# Altium PCB YiWallet-Enc-memory.PcbDoc
Units mm, origin at the board's own origin, x right, y up, seen from the top; angles counter-clockwise.
Board outline 15 x 30 mm, 4 copper layers (Top Layer, GND, VCC, Bottom Layer), stack 0.778 mm thick; 21 components, 23 nets, 98 pads, 22 vias.
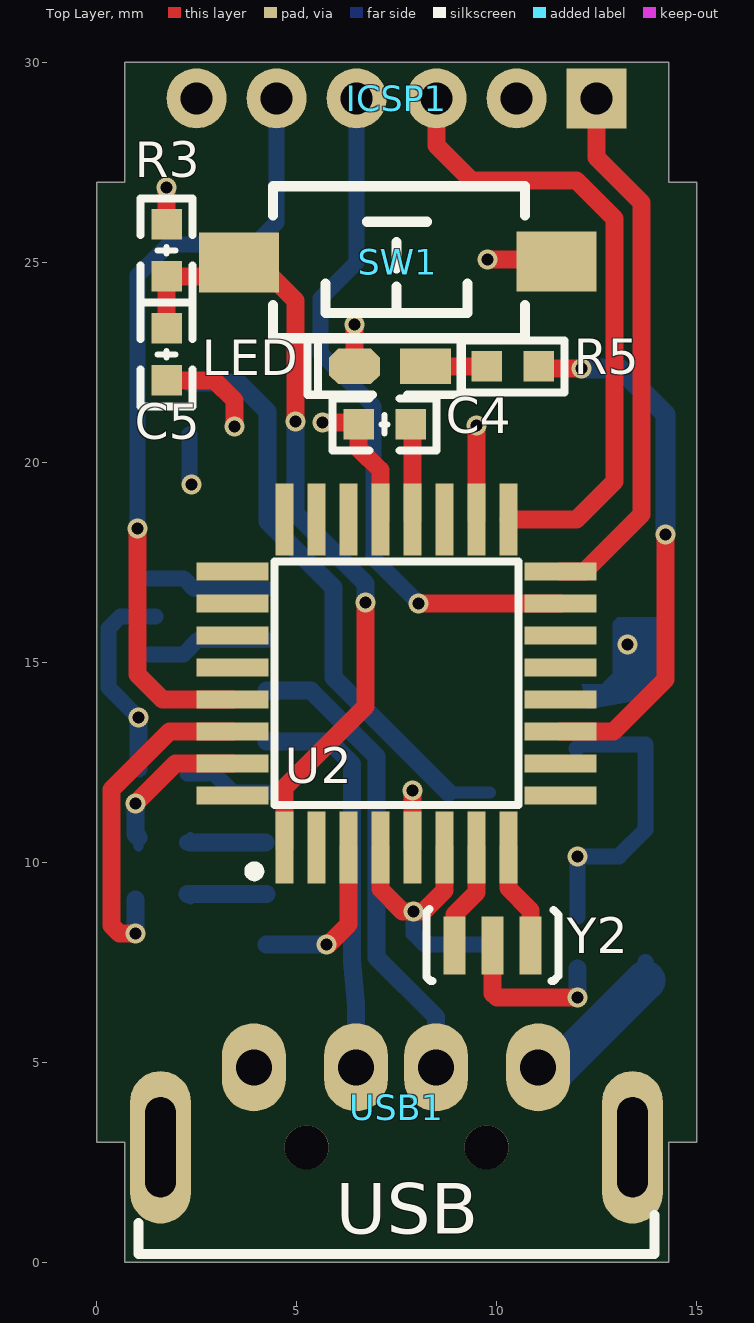
[diagram p0: Top Layer view]
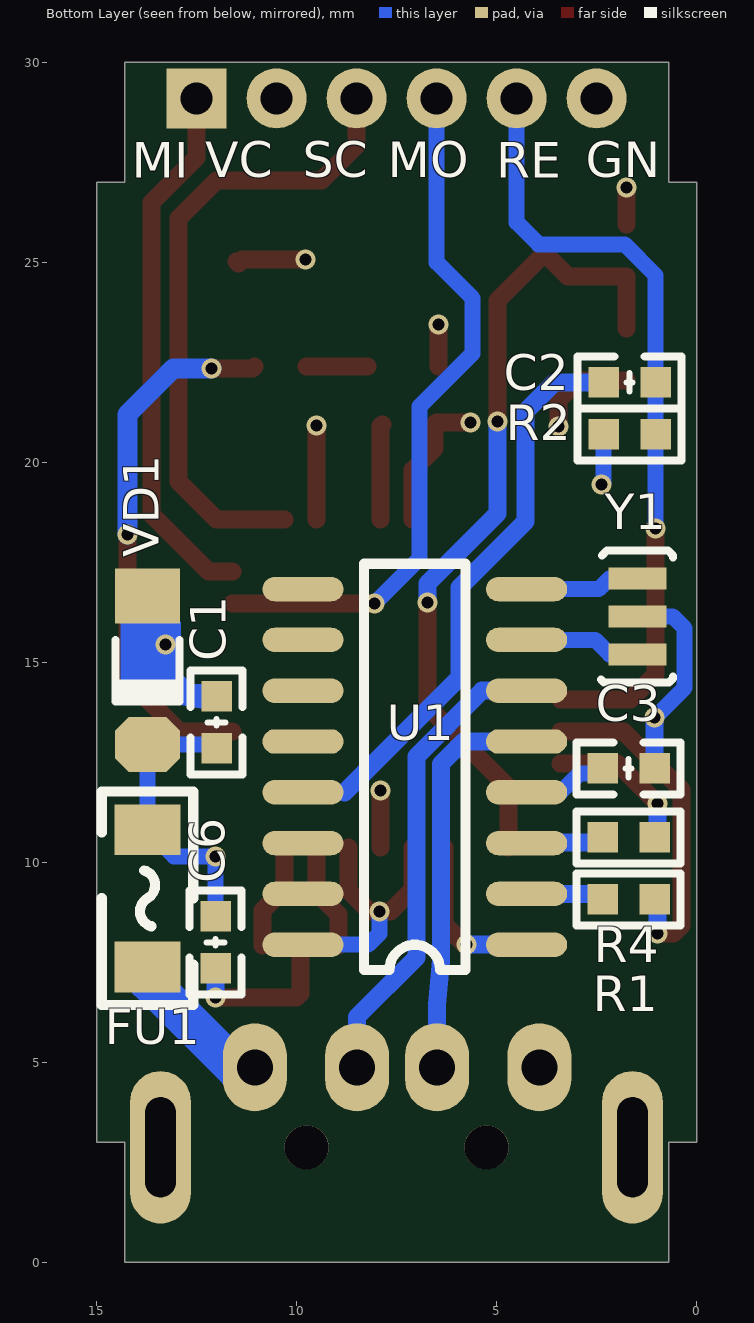
[diagram p1: Bottom Layer view, seen from below]
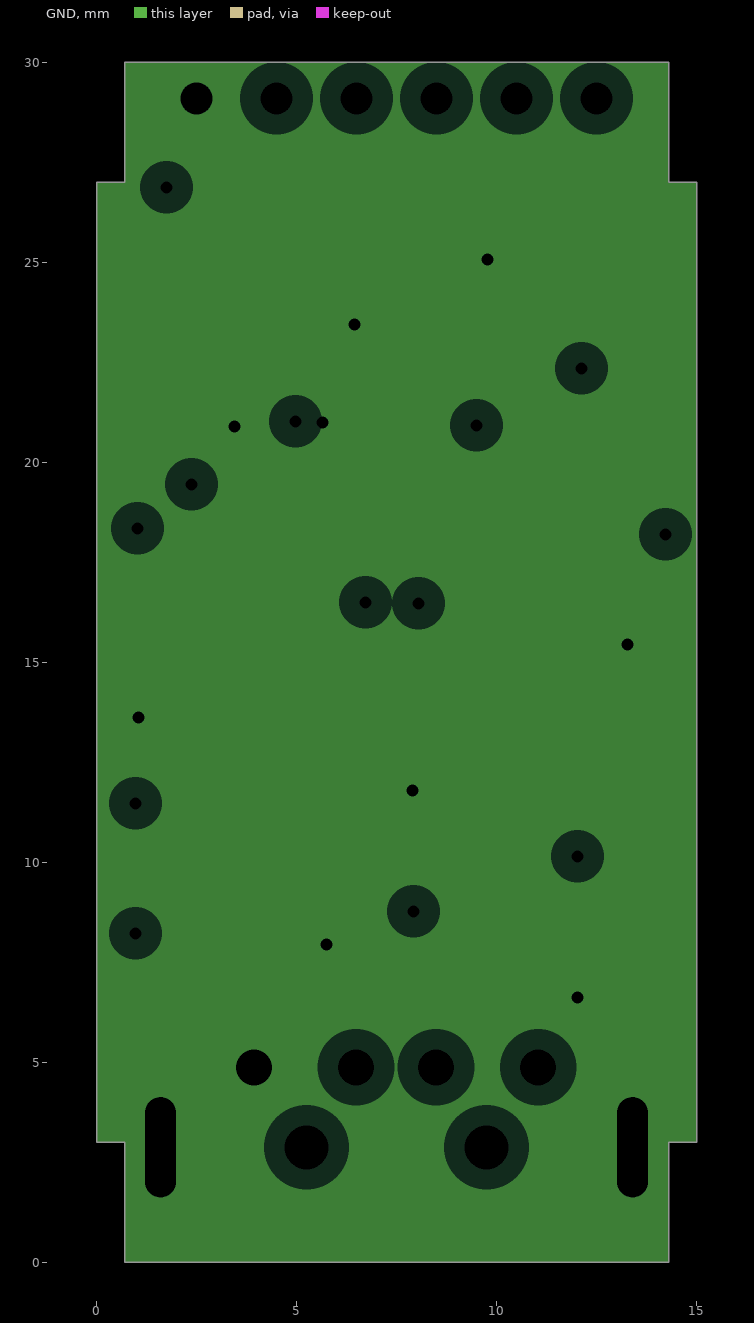
[diagram p2: GND, clearances drawn from the general rule]
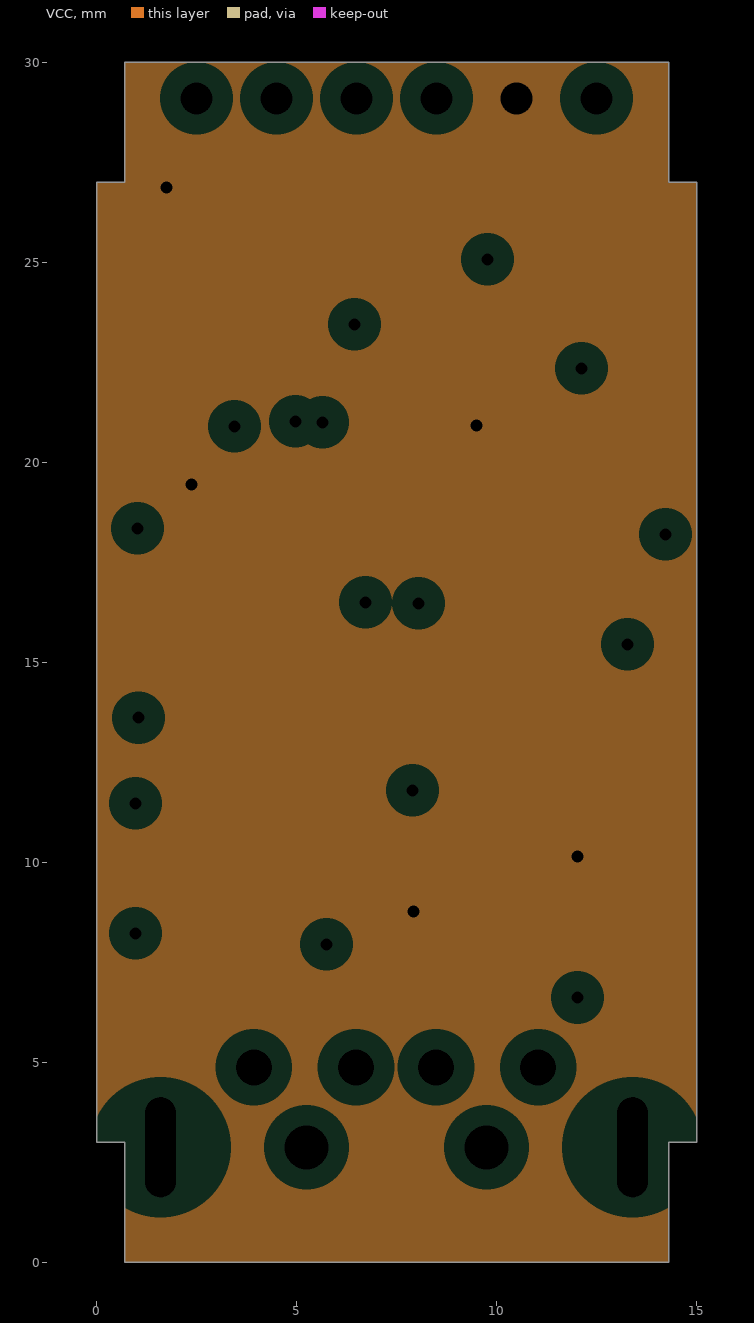
[diagram p3: VCC, clearances drawn from the general rule]
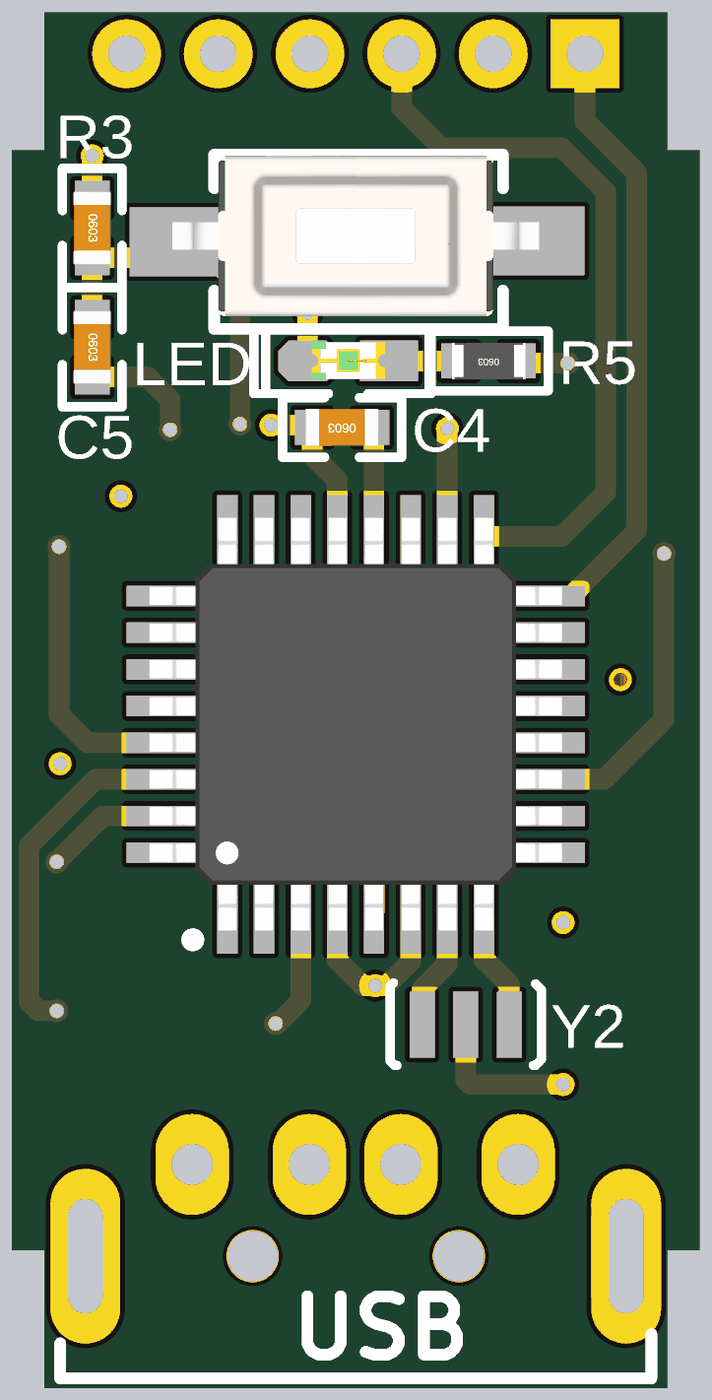
[diagram p4: 3D render of the assembled board from above, using the file's embedded part models]
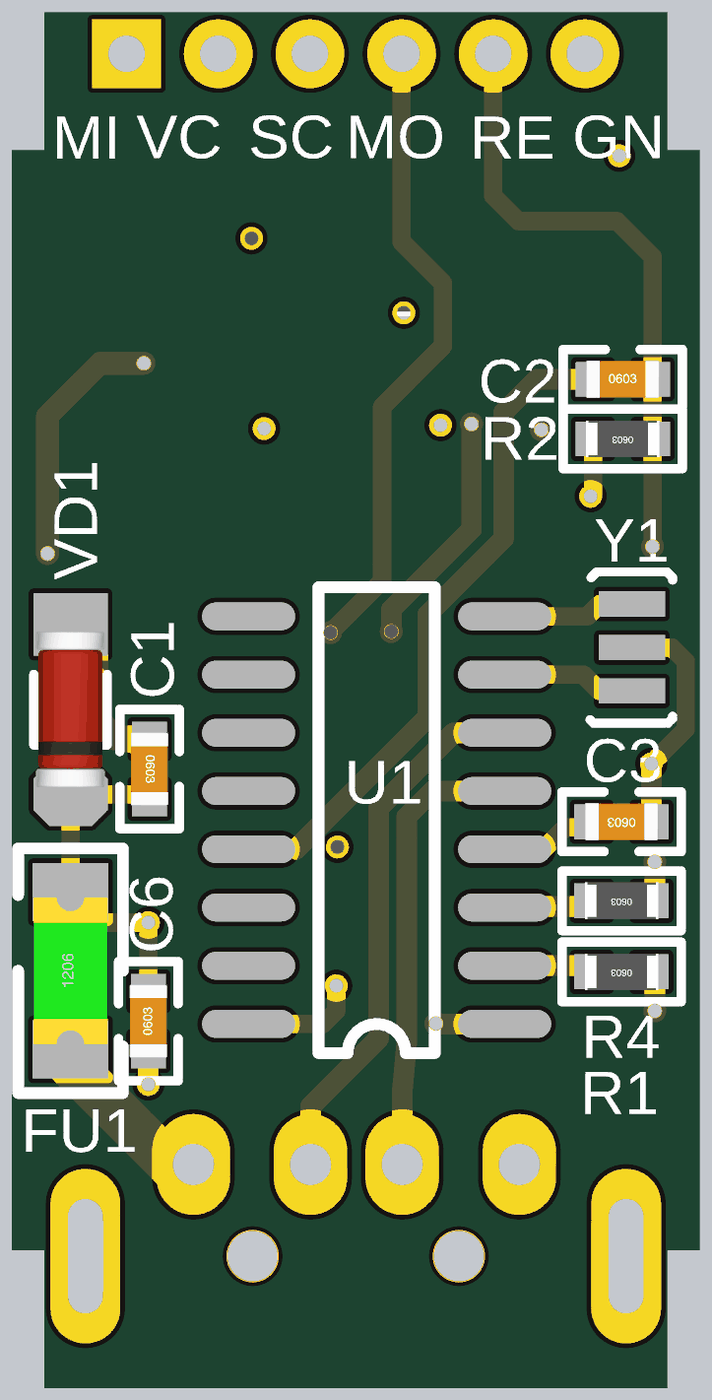
[diagram p5: 3D render of the assembled board from below, using the file's embedded part models]

## Layer stack, top to bottom
Top Solder: solder mask 0.0102, Solder Resist, Dk 3.5
Top Layer: signal copper 0.0356
Dielectric 1: core 0.254, FR-4, Dk 4.2
GND: plane copper 0.036, net GND
Dielectric 3: prepreg 0.127, Dk 4.2
VCC: plane copper 0.036, net VCC
Dielectric 2: core 0.254, Dk 4.2
Bottom Layer: signal copper 0.0356
Bottom Solder: solder mask 0.0102, Solder Resist, Dk 3.5

## Board outline
0,3 0,27 0.7,27 0.7,30 14.3,30 14.3,27 15,27 15,3 14.3,3 14.3,0 0.7,0 0.7,3

## Design rules (kind name [scope] priority, off if disabled: settings)
Clearance [All] p1: gap=0.1 ignorepadtopadclearanceinfootprint=FALSE
PlaneClearance [All] p1: clearance=0.508
PlaneConnect [All] p1: planeconnectstyle=Relief reliefexpansion=0.508 reliefentries=4 reliefconductorwidth=0.254 reliefairgap=0.254
PolygonConnect [All] p1: connectstyle=Relief reliefconductorwidth=0.254 reliefentries=4 polygonreliefangle="90 Angle" airgapwidth=0.254
RoutingVias [All] p1: holewidth=0.3 width=0.5 viastyle="Through Hole" minholewidth=0.3 minwidth=0.5 maxholewidth=0.711 maxwidth=1.27
SolderMaskExpansion [All] p1: expansion=0.102
Width [All] p1: maxlimit=10 minlimit=0.254 preferedwidth=0.254 minimp=50.000000 maximp=50.000000 favimp=50.000000
28 further rules are at their usual default settings.

## Classes and differential pairs
component class YiWallet-Enc-memory: C1 C2 C3 C4 C5 C6 FU1 ICSP1 LED R1 R2 R3 R4 R5 SW1 U2 USB1 VD1 Y1

## Components (designator, comment, footprint, x,y, rotation, side; value= is the part's Value field where it differs from the comment)
C1 "104" "C 0603_L" 12,13.5 r270 bottom
C2 "104" "C 0603_L" 1.675,22 r180 bottom
C3 "104" "C 0603_L" 1.7,12.35 r0 bottom
C4 "0.1uF" "C 0603_L" 7.2,20.95 r180 top
C5 "0.1uF 50V" "C 0603_L" 1.75,22.7 r270 top
C6 "10uF" "C 0603_L" 12.025,8 r90 bottom
FU1 "SMD1206P050TF 1206 500MA 0.5A 5V" "FU 1206" 13.725,9.1 r90 bottom
ICSP1 "ICSP" PH2.0-LI-6P 7.5,29.1 r180 top
LED "红色" "LED 0603G" 7.336,22.407 r180 top
R1 "1K" "R 0603_L" 1.7,9.075 r0 bottom
R2 "10K" "R 0603_L" 1.675,20.7 r0 bottom
R3 "4.7KΩ ±5%" "C 0603_L" 1.75,25.3 r270 top
R4 "1K" "R 0603_L" 1.7,10.625 r0 bottom
R5 "1K" "R 0603_L" 10.4,22.4 r180 top
SW1 "3x6x5" "TSW SMD-3*6*2.5" 7.5,25 r180 top locked
U1 "CH340G" SO-16 3.894,12.309 r0 bottom locked
U2 "ATmega328P-A" TQFP32-7*7 7.5,14.475 r0 top locked
USB1 "USB" USB_A/P_A 7.5,2.875 r0 top locked
VD1 "ZMM5V1 稳压二极管" "MINI_MELF (LL34)" 13.725,14.8 r270 bottom
Y1 "12M(村田3x1)" X-CPX20 1.475,16.15 r90 bottom
Y2 "16M(村田3x1)" X-CPX20 9.9,7.925 r0 top

## Footprints (in the part's own frame and the unit in brackets; to place one, negate y for a bottom-side part, rotate by r counter-clockwise, add the part's x,y. Pads: shape width x height; smd on the part's side, far side on the other; paste and mask are expansions set on the pad)
"C 0603_L" [mil]
  rect 30x30 smd: 1(-25.59,0) 2(25.59,0)
  silkscreen extent -51,-26 51,26, body extent -31,-16 31,16, height 32
"FU 1206" [mil] "贴片保险丝"
  rect 50x65 smd: 1(-67.5,0) 2(67.5,0)
  silkscreen extent -105,-45 105,45, body extent -63,-32 63,32, height 34
"LED 0603G" [mil] "绿色0603LED"
  rect 50x35 smd: 1(-34.99,0.26)
  oct 50x35 smd: 2(35.01,0.26)
  silkscreen extent -71,-28 81,28, body extent -31,-16 32,16, height 18
"MINI_MELF (LL34)" [mm] "1.5*3.4mm(直径，脚距）"
  rect 1.37x1.62 smd: 1(-1.855,0)
  oct 1.37x1.62 smd: 2(1.855,0)
  silkscreen extent -0.76,-0.8 0.78,0.8, body extent -1.7,-0.75 1.7,0.75, height 1.5
PH2.0-LI-6P [mm] "长：13.9mm，宽：4.7mm，高：6mm"
  rect 1.5x1.5 hole 0.8: 1(-5,0)
  round 1.5 hole 0.8: 2(-3,0) 3(-1,0) 4(1,0) 5(3,0) 6(5,0)
"R 0603_L" [mil] "1/10W贴片电阻"
  rect 30x30 smd: 1(-25.6,0) 2(25.59,0)
  silkscreen extent -51,-26 51,26, body extent -31,-16 31,16, height 16
SO-16 [mil]
  oval 80x24 smd: 1(14,172) 2(14,122) 3(14,72) 4(14,22) 5(14,-28) 6(14,-78) 7(14,-128) 8(14,-178) 9(234,-178) 10(234,-128) 11(234,-78) 12(234,-28) 13(234,22) 14(234,72) 15(234,122) 16(234,172)
  silkscreen extent 74,-203 174,197
TQFP32-7*7 [mm] "7x7mm, 0.8mm(蒜米工坊）"
  rect 0.45x1.8 smd: 1(-2.803,-4.1) 2(-2.003,-4.1) 3(-1.203,-4.1) 4(-0.403,-4.1) 5(0.397,-4.1) 6(1.197,-4.1) 7(1.997,-4.1) 8(2.797,-4.1) 17(2.797,4.1) 18(1.997,4.1) 19(1.197,4.1) 20(0.397,4.1) 21(-0.403,4.1) 22(-1.203,4.1) 23(-2.003,4.1) 24(-2.803,4.1)
  rect 1.8x0.45 smd: 9(4.097,-2.8) 10(4.097,-2) 11(4.097,-1.2) 12(4.097,-0.4) 13(4.097,0.4) 14(4.097,1.2) 15(4.097,2) 16(4.097,2.8) 25(-4.103,2.8) 26(-4.103,2) 27(-4.103,1.2) 28(-4.103,0.4) 29(-4.103,-0.4) 30(-4.103,-1.2) 31(-4.103,-2) 32(-4.103,-2.8)
  silkscreen extent -3.68,-4.82 3.05,3.05, body extent -4.5,-4.5 4.5,4.5, height 1.05
"TSW SMD-3*6*2.5" [mm]
  rect 2x1.5 smd: 1(-3.996,-0.02) 2(3.937,0)
  silkscreen extent -3.21,-1.9 3.09,1.9, body extent -4,-1.88 4,1.62, height 2.59
USB_A/P_A [mm] "A型USB 插头，20*13*4.5mm"
  round 1.1 hole 1.1: 0(-2.25,0) 0(2.25,0)
  oval 1.6x2.2 hole 0.9: 1(3.543,2) 2(0.987,2) 3(-1.013,2) 4(-3.569,2)
  oval 1.524x3.81 hole 0.762 slot 2.5 at 90 deg: 4(-5.9,0) 4(5.9,0)
  silkscreen extent -6.45,-2.67 6.45,-1.7, body extent -6.47,-17.9 6.47,2.11, height 3.25
X-CPX20 [mm]
  rect 0.55x1.45 smd: 1(-0.95,0) 2(0,0) 3(0.95,0)
  silkscreen extent -1.65,-0.89 1.65,0.91

## Part data
C1 C2 C3 C6: library part C, "无极性贴片电容"
C4: library part "Cap Pol3", "Polarized Capacitor (Surface Mount)", Published=8-Jun-2000, Publisher="Altium Limited", Revision="July-2002: Re-released for DXP Platform."
C5: library part "C-0.1uF 50V 0603", "贴片电容 0.1uF 50V ±10% -55~+125℃ 0603 X7R CL10B104KB8NNNC", LH=C01-100N26-100, U_TABLE=U_C
FU1: library part FU, "贴片保险丝"
ICSP1: library part "Header 3X2", "Header, 3-Pin, Dual row", LatestRevisionDate=17-Jul-2002, LatestRevisionNote="Re-released for DXP Platform.", Publisher="Altium Limited"
LED: library part LED-SMD, "贴片LED"
R1 R2 R4 R5: library part R, "贴片电阻"
R3: library part "R-4K7 0603 5%", "贴片电阻 4.7KΩ 1/10W ±5% ±200ppm 0603", LH=R01-4K7026-100, U_TABLE=U_R
SW1: library part "TSW 3x6", "3x6轻触开关"
U2: library part ATmega8-16AC, "8-Bit AVR Microcontroller with 8K Bytes of In-System Programmable Flash Memory"
USB1: library part USB-A/P, "USB-A型公接口", BOM名称=U
VD1: library part 1N4148, "高速开关二极管"
Y1 Y2: library part ECS-35-17-4-3IL, "Crystal Oscillator, 3rd In-Line Lead Version", Package Reference=HC-49US, Datasheet="Latest Revision: 18-Apr-2000", Published=17-Jul-2002, Publisher="Altium Limited"

## Via types
v1: diameter 0.5, hole 0.3, Top Layer to Bottom Layer, 12 vias
v2: diameter 0.5, hole 0.3, Top Layer to Bottom Layer, tented both sides, 10 vias

## Nets (pads, with @x,y where several pads share a name; then routed paths per layer and width w, separated by ;. In a path a pad name is that pad's centre, name@x,y a point inside that pad or via, vN(x,y) a via of type N, cw(c..) or ccw(c..) an arc to the next point about the centre after c; other vN are vias at no path point)
5V: FU1.1 USB1.1 | length 4.1
  Bottom Layer w0.4: FU1.1@13.725,7.05 FU1.1 FU1.1@13.725,7.511
  Bottom Layer w1: USB1.1 11.043,4.8 11.475,4.8 FU1.1@13.725,7.05
D+: U1.5 USB1.3 | length 10
  Bottom Layer w0.3: USB1.3@6.487,4.8 USB1.3
  Bottom Layer w0.45: U1.5 5.83,13.02 6.387,12.463 6.387,7.538 6.487,6.45 USB1.3
D-: U1.6 USB1.2 | length 11.9
  Bottom Layer w0.3: USB1.2@8.487,4.8 USB1.2
  Bottom Layer w0.45: U1.6 5.36,14.29 7,12.65 7,7.625 8.487,6.138 USB1.2
GND: C1.1 C3.1 C4.2 C5.2 C6.1 ICSP1.6 LED.2 SW1.1 U1.1 U2.3 U2.5 U2.21 USB1.4 VD1.1 Y1.2 Y2.2 | length 23.7
  Top Layer w0.45: C5.2 2.95,22.05 3.45,21.55 v2(3.45,20.9) ; v1(5.65,21) 6.5,21 C4.2 6.55,20.35 7.097,19.803 U2.21 ; v2(5.75,7.95) 5.8,7.95 6.297,8.447 U2.3 ; LED.2 6.447,23.447 v1(6.45,23.45) ; U2.5 7.9,10.378 v1(7.9,11.8) ; v1(9.775,25.075) 11.351,25.075 11.451,24.975 SW1.1 ; Y2.2 9.9,6.725 10.006,6.619 v1(12.025,6.619)
  Bottom Layer w0.254: v2@5.7,7.94 v2@5.74,7.899
  Bottom Layer w0.4: v1(1.05,13.615) 0.3,14.365 0.3,15.85 0.6,16.15 Y1.2
  Bottom Layer w0.45: C3.1 v1(1.05,13.615) ; U1.1 v2@5.7,7.94 ; v1(12.025,6.619) C6.1
  other v1: 13.275,15.45
KEY2: C5.1 R3.2 SW1.2 U2.1 | length 20.5
  Top Layer w0.45: C5.1 R3.2 3.213,24.65 SW1.2 3.794,25.231 4.275,24.75 4.975,24.05 v2(4.975,21.025) ; U2.1 4.697,11.872 6.725,13.9 v2(6.725,16.5)
  Bottom Layer w0.45: v2(4.975,21.025) 4.975,18.725 6.725,16.975 v2(6.725,16.5)
MISO: ICSP1.1 U2.16 | length 13.5
  Top Layer w0.45: U2.16 12.2,17.275 13.625,18.7 13.625,26.5 12.5,27.625 ICSP1.1
MOSI: ICSP1.4 U2.15 | length 17.6
  Top Layer w0.45: v2(8.05,16.475) U2.15
  Bottom Layer w0.4: ICSP1.4 6.5,25 5.6,24.1 5.6,22.725 6.925,21.4 6.925,17.6 v2(8.05,16.475)
NetC2_1: C2.1 U1.13 | length 14.7
  Bottom Layer w0.3: 8.8,11.75 U1.13
  Bottom Layer w0.45: C2.1 3.55,22 4.275,21.275 4.275,18.525 5.925,16.875 5.925,14.625 8.8,11.75
NetC3_2: C3.2 U1.4 | length 2.4
  Bottom Layer w0.254: C3.2@2.275,12.225 2.35,12.225 C3.2
  Bottom Layer w0.4: C3.2@2.275,12.225 2.925,12.225 3.4,11.75 U1.4
NetC4_1: C4.1 U2.20 | length 2.4
  Top Layer w0.45: C4.1 7.897,20.903 U2.20
NetLED_1: LED.1 R5.2 | length 1.5
  Top Layer w0.45: LED.1 R5.2
NetR1_1: R1.1 U2.30 | length 8.6
  Top Layer w0.45: v2(0.975,8.225) 0.575,8.225 0.375,8.425 0.375,11.825 1.825,13.275 U2.30
  Bottom Layer w0.3: R1.1@0.975,9.075 R1.1
  Bottom Layer w0.45: v2(0.975,8.225) R1.1@0.975,9.075
NetR4_1: R4.1 U2.31 | length 3.9
  Top Layer w0.45: v2(0.975,11.475) 1.975,12.475 U2.31
  Bottom Layer w0.254: R4.1@1.05,10.4 R4.1
  Bottom Layer w0.45: v2(0.975,11.475) 0.975,10.7 R4.1
NetR5_1: R5.1 U2.11 | length 13.5
  Top Layer w0.45: R5.1 11.1,22.35 v2(12.125,22.35) ; U2.11 12.925,13.275 14.225,14.575 v2(14.225,18.2)
  Bottom Layer w0.5: v2(12.125,22.35) 13.075,22.35 14.225,21.2 v2(14.225,18.2)
NetU2_7: U2.7 Y2.1 | length 2.7
  Top Layer w0.45: Y2.1 8.95,8.7 9.497,9.247 U2.7
NetU2_8: U2.8 Y2.3 | length 2.7
  Top Layer w0.45: U2.8 10.297,9.353 10.85,8.8 Y2.3
RESET: C2.2 ICSP1.5 R2.1 U2.29 | length 19.7
  Top Layer w0.45: v2(1.025,18.35) 1.025,14.7 1.65,14.075 U2.29
  Bottom Layer w0.4: v2(1.025,18.35) R2.1 C2.2 1.025,24.675 1.8,25.45 3.95,25.45 4.5,26 ICSP1.5
RXD: R4.2 U1.3 | length 2.2
  Bottom Layer w0.254: R4.2@2.263,10.5 2.275,10.5 2.35,10.5 R4.2
  Bottom Layer w0.4: R4.2@2.263,10.5 2.275,10.5 R4.2@2.35,10.5 ; U1.3@4.23,10.5 U1.3
  Bottom Layer w0.45: R4.2@2.35,10.5 U1.3@4.23,10.5
SCK: ICSP1.3 U2.17 | length 16
  Top Layer w0.45: ICSP1.3 8.5,27.925 9.375,27.05 12,27.05 12.95,26.1 12.95,19.525 12,18.575 U2.17
TXD: R1.2 U1.2 | length 2.2
  Bottom Layer w0.254: R1.2@2.263,9.2 2.35,9.2 R1.2
  Bottom Layer w0.4: R1.2@2.263,9.2 R1.2@2.272,9.21
  Bottom Layer w0.45: R1.2@2.272,9.21 U1.2
VCC: C1.2 C6.2 FU1.2 ICSP1.2 R2.2 R3.1 U1.16 U2.4 U2.6 U2.18 VD1.2 | length 18.8
  Top Layer w0.45: R3.1 v1(1.75,26.875) ; U2.4 7.097,9.328 7.65,8.775 v1(7.925,8.775) 8.175,8.775 8.697,9.297 U2.6 ; U2.18 9.497,20.922 v1(9.5,20.925)
  Bottom Layer w0.254: C1.2 C1.2@12,12.954
  Bottom Layer w0.4: R2.2 2.325,19.5 v1(2.375,19.45) ; v1(7.925,8.775) 7.925,8.225 8.21,7.94 U1.16 ; C1.2 12.095,12.945 VD1.2 FU1.2 13.06,10.15 v1(12.025,10.15) ; C6.2 v1(12.025,10.15)
XI: U1.7 Y1.1 | length 3.2
  Bottom Layer w0.4: Y1.1@1.2,15.2 Y1.1 2.175,15.2 2.535,15.56 U1.7
XO: U1.8 Y1.3 | length 3.2
  Bottom Layer w0.4: Y1.3@1.2,17.1 Y1.3 2.175,17.1 2.445,16.83 U1.8
pads on no net: U1.9 U1.10 U1.11 U1.12 U1.14 U1.15 U2.2 U2.9 U2.10 U2.12 U2.13 U2.14 U2.19 U2.22 U2.23 U2.24 U2.25 U2.26 U2.27 U2.28 U2.32 USB1.0

## Polygon pours and split planes (outlines as drawn)
no net on Bottom Layer "Bottom Layer-No Net" (solid, pour order 0): 0.7,30
GND on GND (split plane): 14.299,27 14.299,26.999 14.3,26.999 14.999,26.999 14.999,3.001 14.3,3.001 14.299,3.001 14.299,3 14.299,0.001 0.701,0.001 0.701,3 0.701,3.001 0.7,3.001 0.001,3.001 0.001,26.999 0.7,26.999 0.701,26.999 0.701,27 0.701,29.999 14.299,29.999
VCC on VCC (split plane): 14.299,27 14.299,26.999 14.3,26.999 14.999,26.999 14.999,3.001 14.3,3.001 14.299,3.001 14.299,3 14.299,0.001 0.701,0.001 0.701,3 0.701,3.001 0.7,3.001 0.001,3.001 0.001,26.999 0.7,26.999 0.701,26.999 0.701,27 0.701,29.999 14.299,29.999

## Other copper
Top Layer:
  region: 5.35,21.7
Bottom Layer:
  region net GND: 12.125,14.45 12.625,14.45 12.9,14.725 12.9,16 13.025,16.125 14.3,16.125 14.4,16.025 14.4,14.509 13.886,14.1 12.275,13.825

## Silkscreen, mask and mechanical layers (free items; w line width, h text height)
Bottom Overlay:
  text "GN" at 2.775,26.825 h1.52
  text "MO" at 7.716,26.825 h1.52
  text "SC" at 9.844,26.825 h1.52
  text "VC" at 12.284,26.825 h1.52
  text "RE" at 5.011,26.808 h1.52
  text "MI" at 14.125,26.808 h1.52
Mechanical 1:
  the board outline again, w0.1